# Altium PCB STC15.PcbDoc
Units mil, origin at the board's own origin, x right, y up, seen from the top; angles counter-clockwise.
Board outline 6000 x 4000 mil, 2 copper layers (Top Layer, Bottom Layer); 4 components, 0 nets, 136 pads, 0 vias.
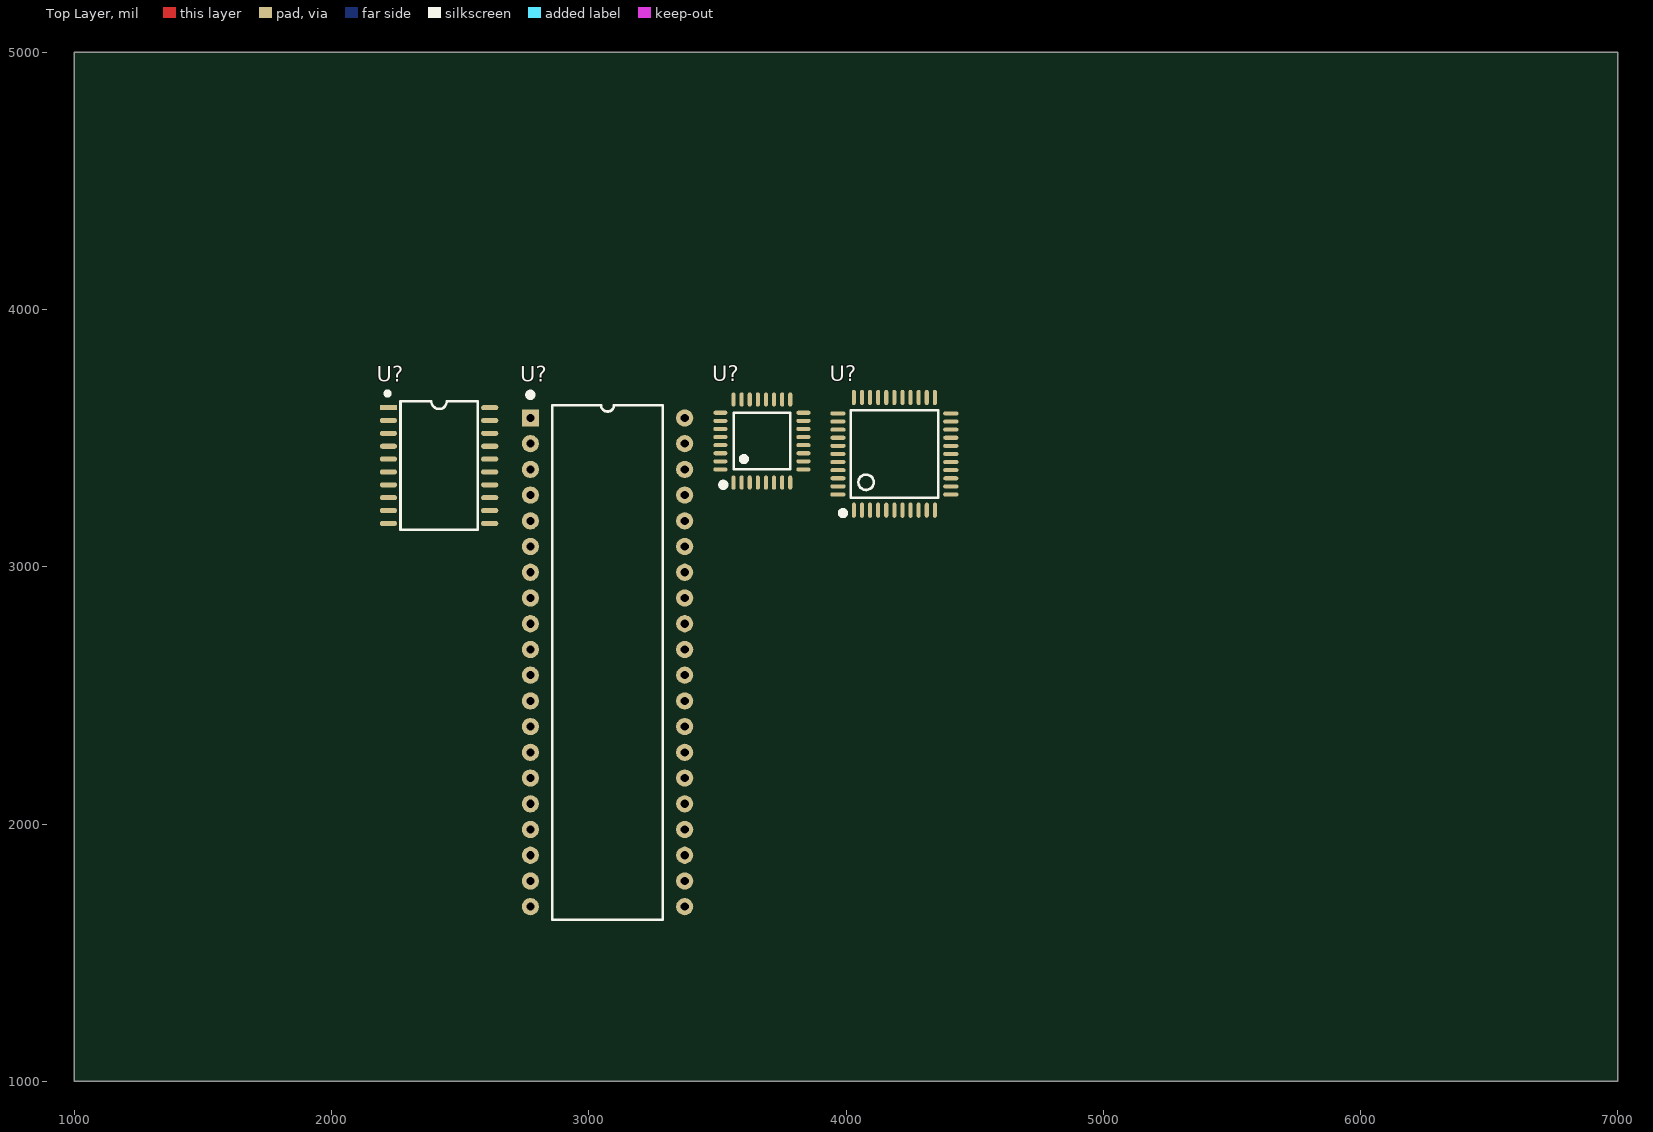
[diagram p0: Top Layer view]
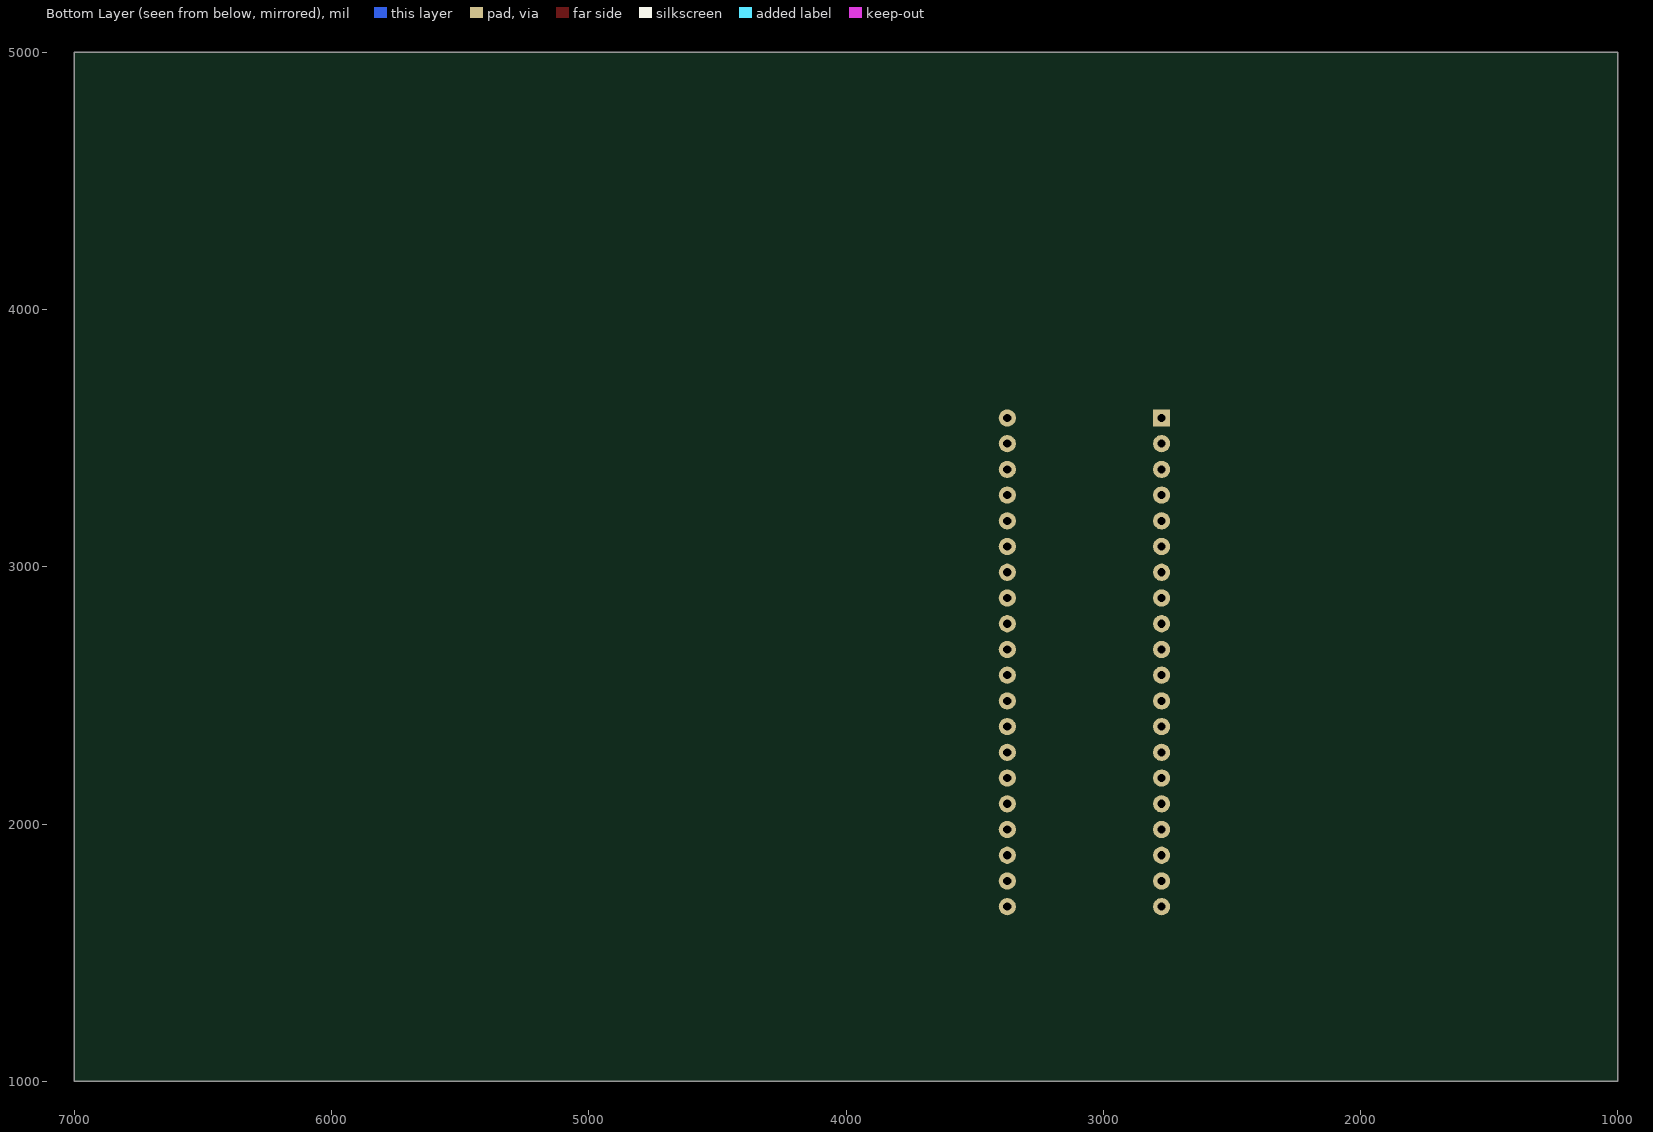
[diagram p1: Bottom Layer view, seen from below]

## Layer stack, top to bottom
Top Solder: solder mask 0.4, Solder Resist, Dk 3.5
Top Layer: signal copper 1.4
Dielectric 1: dielectric 12.6, FR-4, Dk 4.8
Bottom Layer: signal copper 1.4
Bottom Solder: solder mask 0.4, Solder Resist, Dk 3.5

## Board outline
1000,1000 7000,1000 7000,5000 1000,5000

## Design rules (kind name [scope] priority, off if disabled: settings)
Clearance [All] p1: gap=10 ignorepadtopadclearanceinfootprint=FALSE except(0: Arc-Hole Track-Hole SMDPad-Hole THPad-Hole Via-Hole Fill-Hole Poly-Hole Region-Hole Text-Hole)
PolygonConnect [All] p1: connectstyle=Relief reliefconductorwidth=10 reliefentries=4 polygonreliefangle="90 Angle" airgapwidth=10
RoomDefinition STC15 [InComponentClass('STC15')] p1: confinementstyle=ConfineIn formatcopy=TRUE lockcomponents=FALSE outline 2157.99,1588.54 4457.99,1588.54 4457.99,3798.54 2157.99,3798.54
RoutingVias [All] p1: holewidth=28 width=50 viastyle="Through Hole" minholewidth=28 minwidth=50 maxholewidth=28 maxwidth=50
SolderMaskExpansion [All] p1: expansion=4 istentingtop=FALSE
Width [All] p1: maxlimit=10 minlimit=10 preferedwidth=10
30 further rules are at their usual default settings.

## Classes and differential pairs
component class STC15: U?

## Components (designator, comment, footprint, x,y, rotation, side; value= is the part's Value field where it differs from the comment)
U? "STC15F2K60S2" DIP40-600_MH 3072.99,2628.54 r0 top
U? "STC15W404S" "LQFP44 10x10_L" 4187.99,3438.54 r0 top
U? "STC15W404S" "LQFP32 7x7_L" 3672.99,3488.54 r0 top
U? "STC15W401AS" SOP20_L 2417.99,3393.54 r0 top

## Footprints (in the part's own frame and the unit in brackets; to place one, negate y for a bottom-side part, rotate by r counter-clockwise, add the part's x,y. Pads: shape width x height; smd on the part's side, far side on the other; paste and mask are expansions set on the pad)
DIP40-600_MH [mm] "带底座 52*15.2*4mm(长宽高)"
  rect 1.7x1.7 hole 0.8: 1(-7.62,24.13)
  round 1.7 hole 0.8: 2(-7.62,21.59) 3(-7.62,19.05) 4(-7.62,16.51) 5(-7.62,13.97) 6(-7.62,11.43) 7(-7.62,8.89) 8(-7.62,6.35) 9(-7.62,3.81) 10(-7.62,1.27) 11(-7.62,-1.27) 12(-7.62,-3.81) 13(-7.62,-6.35) 14(-7.62,-8.89) 15(-7.62,-11.43) 16(-7.62,-13.97) 17(-7.62,-16.51) 18(-7.62,-19.05) 19(-7.62,-21.59) 20(-7.62,-24.13) 21(7.62,-24.13) 22(7.62,-21.59) 23(7.62,-19.05) 24(7.62,-16.51) 25(7.62,-13.97) 26(7.62,-11.43) 27(7.62,-8.89) 28(7.62,-6.35) 29(7.62,-3.81) 30(7.62,-1.27) 31(7.62,1.27) 32(7.62,3.81) 33(7.62,6.35) 34(7.62,8.89) 35(7.62,11.43) 36(7.62,13.97) 37(7.62,16.51) 38(7.62,19.05) 39(7.62,21.59) 40(7.62,24.13)
  silkscreen extent -7.87,-25.4 5.46,26.67, body extent -8.9,-26.18 8.9,26.18, height 8.3
"LQFP32 7x7_L" [mm] "32脚，体宽7x7mm，脚距0.8mm"
  oval 0.4x1.4 smd: 1(-2.8,-4.096) 2(-2,-4.096) 3(-1.2,-4.096) 4(-0.4,-4.096) 5(0.4,-4.096) 6(1.2,-4.096) 7(2,-4.096) 8(2.8,-4.096) 17(2.8,4.108) 18(2,4.108) 19(1.2,4.108) 20(0.4,4.108) 21(-0.4,4.108) 22(-1.2,4.108) 23(-2,4.108) 24(-2.8,4.108)
  oval 1.4x0.4 smd: 9(4.102,-2.8) 10(4.102,-2) 11(4.102,-1.2) 12(4.102,-0.4) 13(4.102,0.4) 14(4.102,1.2) 15(4.102,2) 16(4.102,2.8) 25(-4.102,2.8) 26(-4.102,2) 27(-4.102,1.2) 28(-4.102,0.4) 29(-4.102,-0.4) 30(-4.102,-1.2) 31(-4.102,-2) 32(-4.102,-2.8)
  silkscreen extent -4.06,-4.57 2.79,2.79, body extent -4.5,-4.5 4.5,4.5, height 1.45
"LQFP44 10x10_L" [mm] "44脚，体宽10x10mm，脚距0.8mm"
  oval 0.4x1.5 smd: 1(-4,-5.551) 2(-3.2,-5.551) 3(-2.4,-5.551) 4(-1.6,-5.551) 5(-0.8,-5.551) 6(0,-5.551) 7(0.8,-5.551) 8(1.6,-5.551) 9(2.4,-5.551) 10(3.2,-5.551) 11(4,-5.551) 23(4,5.578) 24(3.2,5.578) 25(2.4,5.578) 26(1.6,5.578) 27(0.8,5.578) 28(0,5.578) 29(-0.8,5.578) 30(-1.6,5.578) 31(-2.4,5.578) 32(-3.2,5.578) 33(-4,5.578)
  oval 1.5x0.4 smd: 12(5.575,-4) 13(5.575,-3.2) 14(5.575,-2.4) 15(5.575,-1.6) 16(5.575,-0.8) 17(5.575,0) 18(5.575,0.8) 19(5.575,1.6) 20(5.575,2.4) 21(5.575,3.2) 22(5.575,4) 34(-5.575,4) 35(-5.575,3.2) 36(-5.575,2.4) 37(-5.575,1.6) 38(-5.575,0.8) 39(-5.575,0) 40(-5.575,-0.8) 41(-5.575,-1.6) 42(-5.575,-2.4) 43(-5.575,-3.2) 44(-5.575,-4)
  silkscreen extent -5.33,-6.09 4.32,4.32, body extent -6,-6 6,6, height 1.45
SOP20_L [mm] "13*10.6*2.6（长宽高）"
  rect 1.7x0.5 smd: 1(-5,5.715)
  oval 1.7x0.5 smd: 2(-5,4.445) 3(-5,3.175) 4(-5,1.905) 5(-5,0.635) 6(-5,-0.635) 7(-5,-1.905) 8(-5,-3.175) 9(-5,-4.445) 10(-5,-5.715) 11(5,-5.715) 12(5,-4.445) 13(5,-3.175) 14(5,-1.905) 15(5,-0.635) 16(5,0.635) 17(5,1.905) 18(5,3.175) 19(5,4.445) 20(5,5.715)
  silkscreen extent -5.23,-6.35 3.81,7.27, body extent -5.15,-6.35 5.16,6.35, height 2.7

## Part data
U?: library part STC15F2K60S2-40pin, "STC单片机", BOM名称=STC单片机, 学习资源=www.ooocke.com, 版权归属=源创客
U?: library part STC15W40xS-44pin, "STC单片机", BOM名称=STC单片机, 学习资源=www.ooocke.com, 版权归属=源创客
U?: library part STC15W40xS-32pin, "STC单片机", BOM名称=STC单片机, 学习资源=www.ooocke.com, 版权归属=源创客
U?: library part STC15W40xAS-20pin, "STC单片机", BOM名称=STC单片机, 学习资源=www.ooocke.com, 版权归属=源创客

## Nets (pads, with @x,y where several pads share a name; then routed paths per layer and width w, separated by ;. In a path a pad name is that pad's centre, name@x,y a point inside that pad or via, vN(x,y) a via of type N, cw(c..) or ccw(c..) an arc to the next point about the centre after c; other vN are vias at no path point)
pads on no net: U?.1 U?.2 U?.3 U?.4 U?.5 U?.6 U?.7 U?.8 U?.9 U?.10 U?.11 U?.12 U?.13 U?.14 U?.15 U?.16 U?.17 U?.18 U?.19 U?.20 U?.21 U?.22 U?.23 U?.24 U?.25 U?.26 U?.27 U?.28 U?.29 U?.30 U?.31 U?.32 U?.33 U?.34 U?.35 U?.36 U?.37 U?.38 U?.39 U?.40 U?.41 U?.42 U?.43 U?.44